# Altium PCB current_sense_v2.PcbDoc
Units mil, origin at the board's own origin, x right, y up, seen from the top; angles counter-clockwise.
Board outline 1250 x 1070 mil, 2 copper layers (Top Layer, Bottom Layer); 23 components, 15 nets, 62 pads, 6 vias.
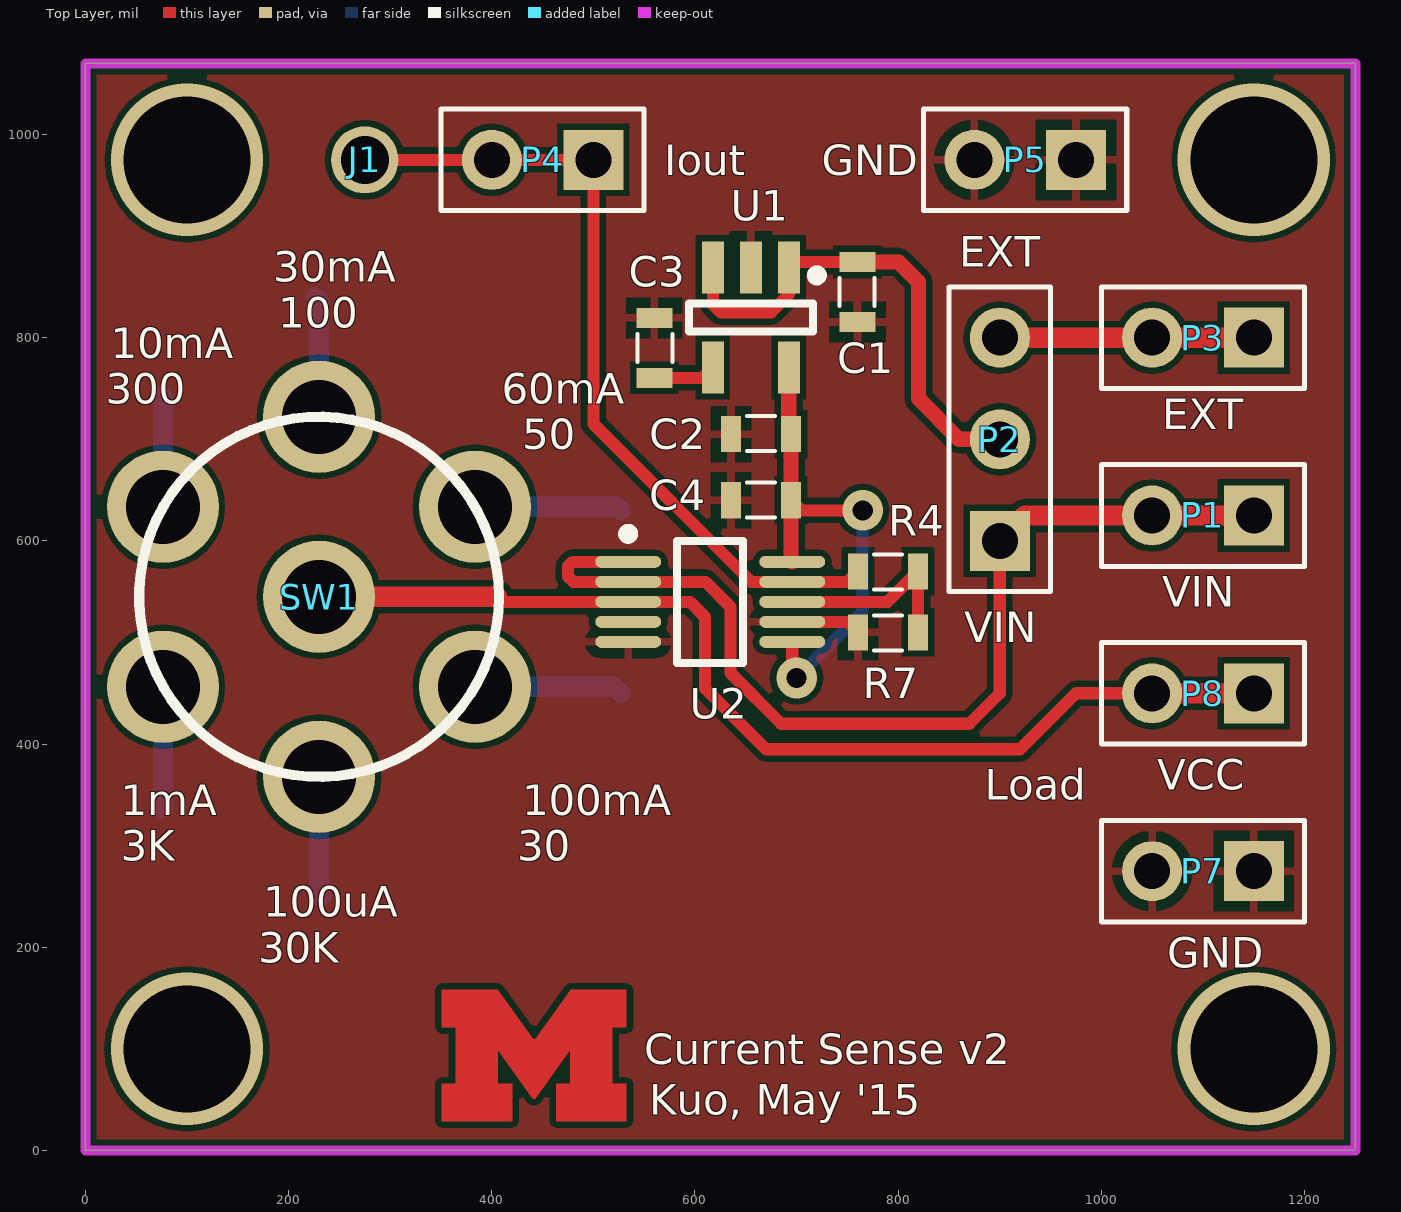
[diagram p0: Top Layer view]
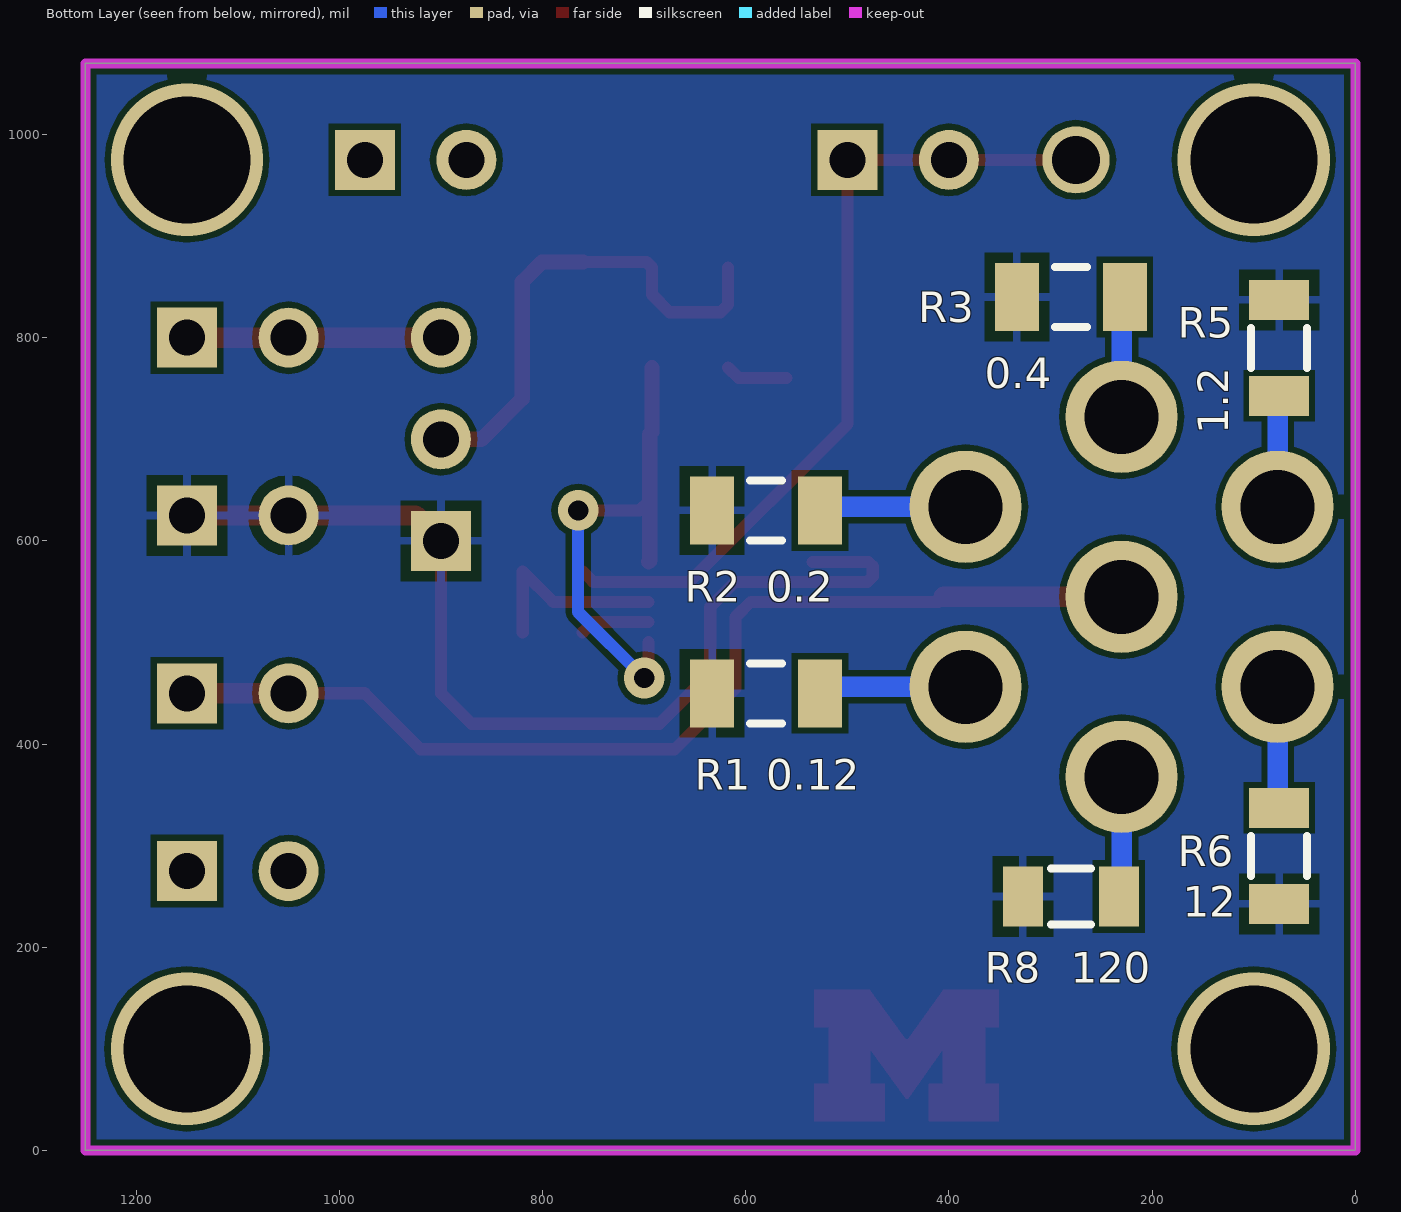
[diagram p1: Bottom Layer view, seen from below]

## Layer stack, top to bottom
Top Solder: solder mask 0.4, Solder Resist, Dk 3.5
Top Layer: signal copper 1.4
Dielectric 1: dielectric 12.6, FR-4, Dk 4.8
Bottom Layer: signal copper 1.4
Bottom Solder: solder mask 0.4, Solder Resist, Dk 3.5

## Board outline
0,0 0,1070 1250,1070 1250,0

## Design rules (kind name [scope] priority, off if disabled: settings)
Clearance "Clearance~Sunstone Circuits" [All] p1: gap=6 // Sunstone Circuits Minimum Clearance Rule (MLB~4&6 Layer Designs)
HoleSize "HoleSize~Sunstone Circuits" [All] p1: absolutevalues=TRUE maxlimit=251 minlimit=8 maxpercent=80.000 minpercent=20.000 // Sunstone Circuits Hole Size Rule (MLB~4&6 Layer Designs)
HoleSize Testpoint [All] p2: absolutevalues=TRUE maxlimit=100 minlimit=1 maxpercent=80.000 minpercent=20.000
HoleSize TestPointUsage [All] p3: absolutevalues=TRUE maxlimit=100 minlimit=1 maxpercent=80.000 minpercent=20.000
MinimumAnnularRing "MinimumAnnularRing~Sunstone Circuits" [All] p1: minimumring=7 // Sunstone Circuits Minimum Annular Ring (MLB~4&6 Layer Designs)
PlaneClearance "PlaneClearance~Sunstone Circuits" [All] p1: clearance=12 // Sunstone Circuits Power Plane Clearance Rule (MLB~4&6 Layer Designs)
PlaneConnect "PlaneConnect~Sunstone Circuits" [All] p1: planeconnectstyle=Relief reliefexpansion=10 reliefentries=4 reliefconductorwidth=8 reliefairgap=10 // Sunstone Circuits Power Plane Connect Rule (MLB~4&6 Layer Designs)
PolygonConnect "PolygonConnect~Sunstone Circuits" [All] p1: connectstyle=Relief reliefconductorwidth=8 reliefentries=4 polygonreliefangle="90 Angle" airgapwidth=10 // Sunstone Circuits Polygon Connect Style (MLB~4&6 Layer Designs)
RoomDefinition current_sense [InComponentClass('current_sense')] p1: confinementstyle=ConfineIn formatcopy=TRUE lockcomponents=FALSE outline 8.34,299.72 8.34,790.28 26.61,790.28 26.61,875.79 189.29,875.79 189.29,889.37 215.4,889.37 215.4,1034.9 337.5,1034.9 337.5,1037.5 1037.5,1037.5 1037.5,862.5 1212.5,862.5 1212.5,212.5 365.79,212.5 365.79,201.61 194.21,201.61 194.21,204.21 26.61,204.21 26.61,299.72
RoutingVias "RoutingVias~Sunstone Circuits" [All] p1: holewidth=16 width=30 viastyle="Through Hole" minholewidth=8 minwidth=24 maxholewidth=20 maxwidth=40 // Sunstone Circuits Routing Vias Rule (MLB~4&6 Layer Designs)
ShortCircuit "ShortCircuit~Sunstone Circuits" [All] p1: allowed=FALSE // Sunstone Circuits Short Circuit Rule~Do Not Allow (MLB~4&6 Layer Designs)
SolderMaskExpansion "SolderMaskExpansion~Sunstone Circuits" [All] p1: expansion=3 // Sunstone Circuits Solder Mask Expansion Rule (MLB~4&6 Layer Designs)
ViasUnderSMD "ViasUnderSMD~Sunstone Circuits" [All] p1: allowed=FALSE // Sunstone Circuits Vias Under SMD~Do Not Allow (MLB~4&6 Layer Designs)
Width "Width~Sunstone Circuits" [All] p1: maxlimit=100 minlimit=6 preferedwidth=10 // Sunstone Circuits Minimum Width Rule (MLB~4&6 Layer Designs)
26 further rules are at their usual default settings.

## Components (designator, comment, footprint, x,y, rotation, side; value= is the part's Value field where it differs from the comment)
C1 "Ceramic capacitor" 0603 760,845 r270 top
C2 "Ceramic capacitor" 0603 665,705 r180 top
C3 "Ceramic capacitor" 0603 560,790 r90 top
C4 "Ceramic capacitor" 0603 665,640 r180 top
J1 "5004" TestPoint 275,975 r0 top
P1 "1 x 2 header" "1x2 header" 1100,625 r180 top
P2 "1 x 3 header" "1x3 header" 900,700 r90 top
P3 "1 x 2 header" "1x2 header" 1100,800 r180 top
P4 "1 x 2 header" "1x2 header" 450,975 r180 top
P5 "1 x 2 header" "1x2 header" 925,975 r180 top
P7 "1 x 2 header" "1x2 header" 1100,275 r180 top
P8 "1 x 2 header" "1x2 header" 1100,450 r180 top
R1 "Chip resistor" 1206 580,450 r180 bottom
R2 "Chip resistor" 1206 580,630 r180 bottom
R3 "Chip resistor" 1206 280,840 r180 bottom
R4 "Chip resistor" 0603 790,570 r0 top
R5 "Chip resistor" 0805 75,790 r270 bottom
R6 "Chip resistor" 0805 75,290 r90 bottom
R7 "Chip resistor" 0603 790,510 r0 top
R8 "Chip resistor" 0805 280,250 r180 bottom
SW1 "MRY106-A" "MRY switch" 230,545 r0 top
U1 "LP3985" SOT23-5 655,820 r270 top
U2 "MAX9922" 10umax 615,540 r0 top

## Footprints (in the part's own frame and the unit in brackets; to place one, negate y for a bottom-side part, rotate by r counter-clockwise, add the part's x,y. Pads: shape width x height; smd on the part's side, far side on the other; paste and mask are expansions set on the pad)
"1x2 header" [mm] "1x2 header, 100 mils"
  rect 1.5x1.5 hole 0.9: 1(-1.27,0)
  round 1.5 hole 0.9: 2(1.27,0)
  silkscreen extent -2.54,-1.27 2.54,1.27, body extent -2.53,-1.26 2.53,1.26, height 8.38
"1x3 header" [mm] "1x3 header, 100 mils"
  rect 1.5x1.5 hole 0.9: 1(-2.54,0)
  round 1.5 hole 0.9: 2(0,0) 3(2.54,0)
  silkscreen extent -3.81,-1.27 3.81,1.27, body extent -3.8,-1.25 3.8,1.25, height 8.38
10umax [mm] "TSSOP, 10-Leads, Body 3.00x3.00mm, Pitch 0.50mm, IPC Medium Density"
  oval 1.65x0.3 smd: 1(-2.05,1) 2(-2.05,0.5) 3(-2.05,0) 4(-2.05,-0.5) 5(-2.05,-1) 6(2.05,-1) 7(2.05,-0.5) 8(2.05,0) 9(2.05,0.5) 10(2.05,1)
  silkscreen extent -2.17,-1.52 0.82,1.82, body extent -1.55,-1.55 1.55,1.55, height 1.1
0603 [mm] "2-Leads, Body 1.55x0.85mm, IPC Medium Density"
  rect 0.5x0.9 smd: 1(-0.75,0) 2(0.75,0)
  silkscreen extent -0.35,-0.45 0.35,0.43, body extent -0.75,-0.42 0.75,0.43, height 0.5
0805 [mm] "Chip Resistor, Body 2.0x1.2mm, IPC Low Density"
  rect 1x1.5 smd: 1(-1.2,0) 2(1.2,0)
  silkscreen extent -0.5,-0.7 0.5,0.7, body extent -1.07,-0.7 1.07,0.7, height 0.7
1206 [mm]
  rect 1.1x1.7 smd: 1(-1.35,0) 2(1.35,0)
  silkscreen extent -0.4,-0.75 0.4,0.75, body extent -1.7,-0.9 1.7,0.9, height 1.3
"MRY switch" [mm]
  round 2.8 hole 1.85: 1(0,-4.5) 2(-3.9,-2.25) 3(-3.9,2.25) 4(0,4.5) 5(3.9,2.25) 6(3.9,-2.25) A(0,0)
  silkscreen extent -4.5,-4.5 4.5,4.5
SOT23-5 [mm] "SOT23, 5-Leads, Body 2.9x1.6mm, Pitch 0.95mm, Lead Span 2.8mm, IPC High Density"
  rect 1.3x0.55 smd: 1(-1.25,0.95) 2(-1.25,0) 3(-1.25,-0.95) 4(1.25,-0.95) 5(1.25,0.95)
  silkscreen extent -1.17,-1.55 0.35,1.78, body extent -0.67,-1.5 0.65,1.5, height 1.45
TestPoint [mm]
  round 1.68 hole 1.2: 1(0,0)
  body extent -1.26,-1.27 1.27,1.27, height 4.57

## Part data
C1 C2: library part C_1u_16V_0603_ceramic, "Ceramic capacitor, 1 uF, 16 V, 0603 package"
C3: library part C_10000p_25V_0603_ceramic, "Ceramic capacitor, 10000 pF, 0603 package"
C4: library part C_0.1u_25V_0603_ceramic, "Ceramic capacitor, 0.1 uF, 0603 package"
J1: library part TestPoint, "TEST POINT PC MINI .040\"D YELLOW"
P1 P2 P3 P4 P5 P7 P8: "100 mils standard header"
R1: library part R_0.12_1206_1%, "Chip resistor, 0.12, 1206 package, current sense"
R2: library part R_0.2_1206_1%, "Chip resistor, 0.2, 1206 package, current sense"
R3: library part R_0.4_1206_1%, "Chip resistor, 0.4, 1206 package, current sense"
R4: library part R_249K_0603_0.1%, "Chip resistor, 249 K, 0603 package"
R5: library part R_1.2_0805_1%, "Chip resistor, 1.2, 0805 package, current sense"
R6: library part R_12_0805, "Chip resistor, 12, 0805 package, current sense"
R7: library part R_1K_0603_0.1%, "Chip resistor, 1 K, 0603 package"
R8: library part R_120_0805, "Chip resistor, 120, 0805 package, current sense"
SW1: "SW ROTARY SP BLK KNOB 125V"
U1: "LP3985 Micropower, 150-mA Low-Noise Ultra Low-Dropout CMOS Voltage Regulator"
U2: "ultra-precision, high-side current-sense amplifier"

## Via types
v1: diameter 150, hole 125, Top Layer to Bottom Layer, 4 vias
v2: diameter 40, hole 20, Top Layer to Bottom Layer, 2 vias

## Nets (pads, with @x,y where several pads share a name; then routed paths per layer and width w, separated by ;. In a path a pad name is that pad's centre, name@x,y a point inside that pad or via, vN(x,y) a via of type N, cw(c..) or ccw(c..) an arc to the next point about the centre after c; other vN are vias at no path point)
GND: C1.2 C2.2 C3.2 C4.2 P5.1 P5.2 P7.1 P7.2 R7.1 U1.2 U2.5 U2.7 | length 69
  Top Layer w12: U2.7 750.16,520.32 R7.1
NetC1_1: C1.1 P2.2 U1.1 U1.3 | length 498.2
  Top Layer w12: U1.3 617.6,832.4 625,825 675,825 692.4,842.4 U1.1 697.72,874.53 C1.1
  Top Layer w15: C1.1 800.47,874.53 820,855 820,740 860,700 P2.2
NetC3_1: C3.1 U1.4 | length 61.9
  Top Layer w12: C3.1 607.28,760.47 U1.4
NetP8_1: P8.1 P8.2 SW1.A U2.3 | length 1045.9
  Top Layer w12: 405,545 410,540 U2.3 595,540 610,525 610,455 670,395 920,395 975,450 P8.2
  Top Layer w20: SW1.A 405,545 ; P8.2 P8.1
NetR1_2: R1.2 SW1.6 | length 146
  Bottom Layer w20: SW1.6 520.43,456.42 R1.2
NetR2_2: R2.2 SW1.5 | length 144.8
  Bottom Layer w20: SW1.5 523.27,633.58 R2.2
NetR3_2: R3.2 SW1.4 | length 119.1
  Bottom Layer w20: R3.2 230,836.85 SW1.4
NetR4_2: R4.2 R7.2 U2.8 | length 196.2
  Top Layer w12: U2.8 789.53,540 R4.2 R7.2
NetR5_2: R5.2 SW1.3 | length 109.8
  Bottom Layer w20: R5.2 76.46,741.3 SW1.3
NetR6_2: R6.2 SW1.2 | length 119.8
  Bottom Layer w20: R6.2 76.46,338.7 SW1.2
NetR8_2: R8.2 SW1.1 | length 119
  Bottom Layer w20: SW1.1 230,252.76 R8.2
VCC3.3: C2.1 C4.1 U1.5 U2.6 U2.10 | length 496.7
  Top Layer w12: C4.1 704.53,630 v2(765,630) ; U2.6 695.71,469.29 v2(700,465)
  Top Layer w15: U1.5 692.4,707.13 C2.1 C4.1 694.53,580.55 U2.10
  Bottom Layer w12: v2(700,465) 765,530 v2(765,630)
VEXT: P2.3 P3.1 P3.2 | length 250
  Top Layer w20: P2.3 P3.2 P3.1
VIN: P1.1 P1.2 P2.1 R1.1 R2.1 R3.1 R5.1 R6.1 R8.1 U2.1 U2.2 | length 1017
  Top Layer w12: U2.1 479.37,579.37 475,575 475,565 480.31,559.69 U2.2 610.31,559.69 635,535 635,470 685,420 870,420 900,450 P2.1
  Top Layer w20: P2.1 925,625 P1.2 P1.1
VOUT: J1.1 P4.1 P4.2 R4.1 U2.9 | length 814.1
  Top Layer w12: J1.1 P4.2 P4.1 500,715 655.31,559.69 U2.9 750.16,559.69 R4.1
pads on no net: U2.4
copper on no net:
  other v1: 100,100 1150,100 100,975 1150,975

## Polygon pours and split planes (outlines as drawn)
GND on Top Layer "Top Layer-No Net" (solid, pour order 2): 0,0 0,1070 1250,1070 1250,0
VIN on Bottom Layer "Top Layer-No Net" (solid, pour order 4): 0,0 0,1070 1250,1070 1250,0

## Keep-outs
Keep-Out Layer:
  the board outline again, w10

## Other copper
Top Layer:
  region: 350.84,28.7 420,28.7 420,65.62 405.93,65.62 405.93,99.03 440.22,50.97 442.56,50.97 477.44,99.03 477.44,65.62 463.37,65.62 463.37,28.7 532.53,28.7 532.53,65.62 518.46,65.62 518.46,121.3 532.53,121.3 532.53,158.22 477.73,158.22 442.56,109.58 440.81,109.58 405.64,158.22 350.84,158.22 350.84,121.3 364.32,121.3 364.32,65.62 350.84,65.62

## Silkscreen, mask and mechanical layers (free items; w line width, h text height)
Top Overlay:
  text "Iout" at 570,960 h30
  text "GND" at 725,960 h30
  text "EXT" at 860,870 h30
  text "30mA" at 185,855 h30
  text "100" at 190,810 h30
  text "10mA" at 25,780 h30
  text "300" at 20,735 h30
  text "60mA" at 410,735 h30
  text "EXT" at 1060,710 h30
  text "50" at 430,690 h30
  text "VIN" at 1060,535 h30
  text "VIN" at 865,500 h30
  text "VCC" at 1055,355 h30
  text "Load" at 885,345 h30
  text "1mA" at 35,330 h30
  text "100mA" at 430,330 h30
  text "3K" at 35,285 h30
  text "30" at 425,285 h30
  text "100uA" at 175,230 h30
  text "30K" at 170,185 h30
  text "GND" at 1065,180 h30
  text "Current Sense v2" at 550,85 h30
  text "Kuo, May '15" at 555,35 h30
Bottom Overlay:
  text "0.4" at 365,750 h30
  text "1.2" at 125,705 h30 r270
  text "0.2" at 580,540 h30
  text "0.12" at 580,355 h30
  text "12" at 170,230 h30
  text "120" at 280,165 h30